# Altium PCB christmas_tree_pcb_copy.PcbDoc
Units mm, origin at the board's own origin, x right, y up, seen from the top; angles counter-clockwise.
Board outline 48 x 48 mm, 2 copper layers (Top Layer, Bottom Layer); 34 components, 19 nets, 76 pads, 29 vias.
Unrouted connection lines stored in the file: 3.
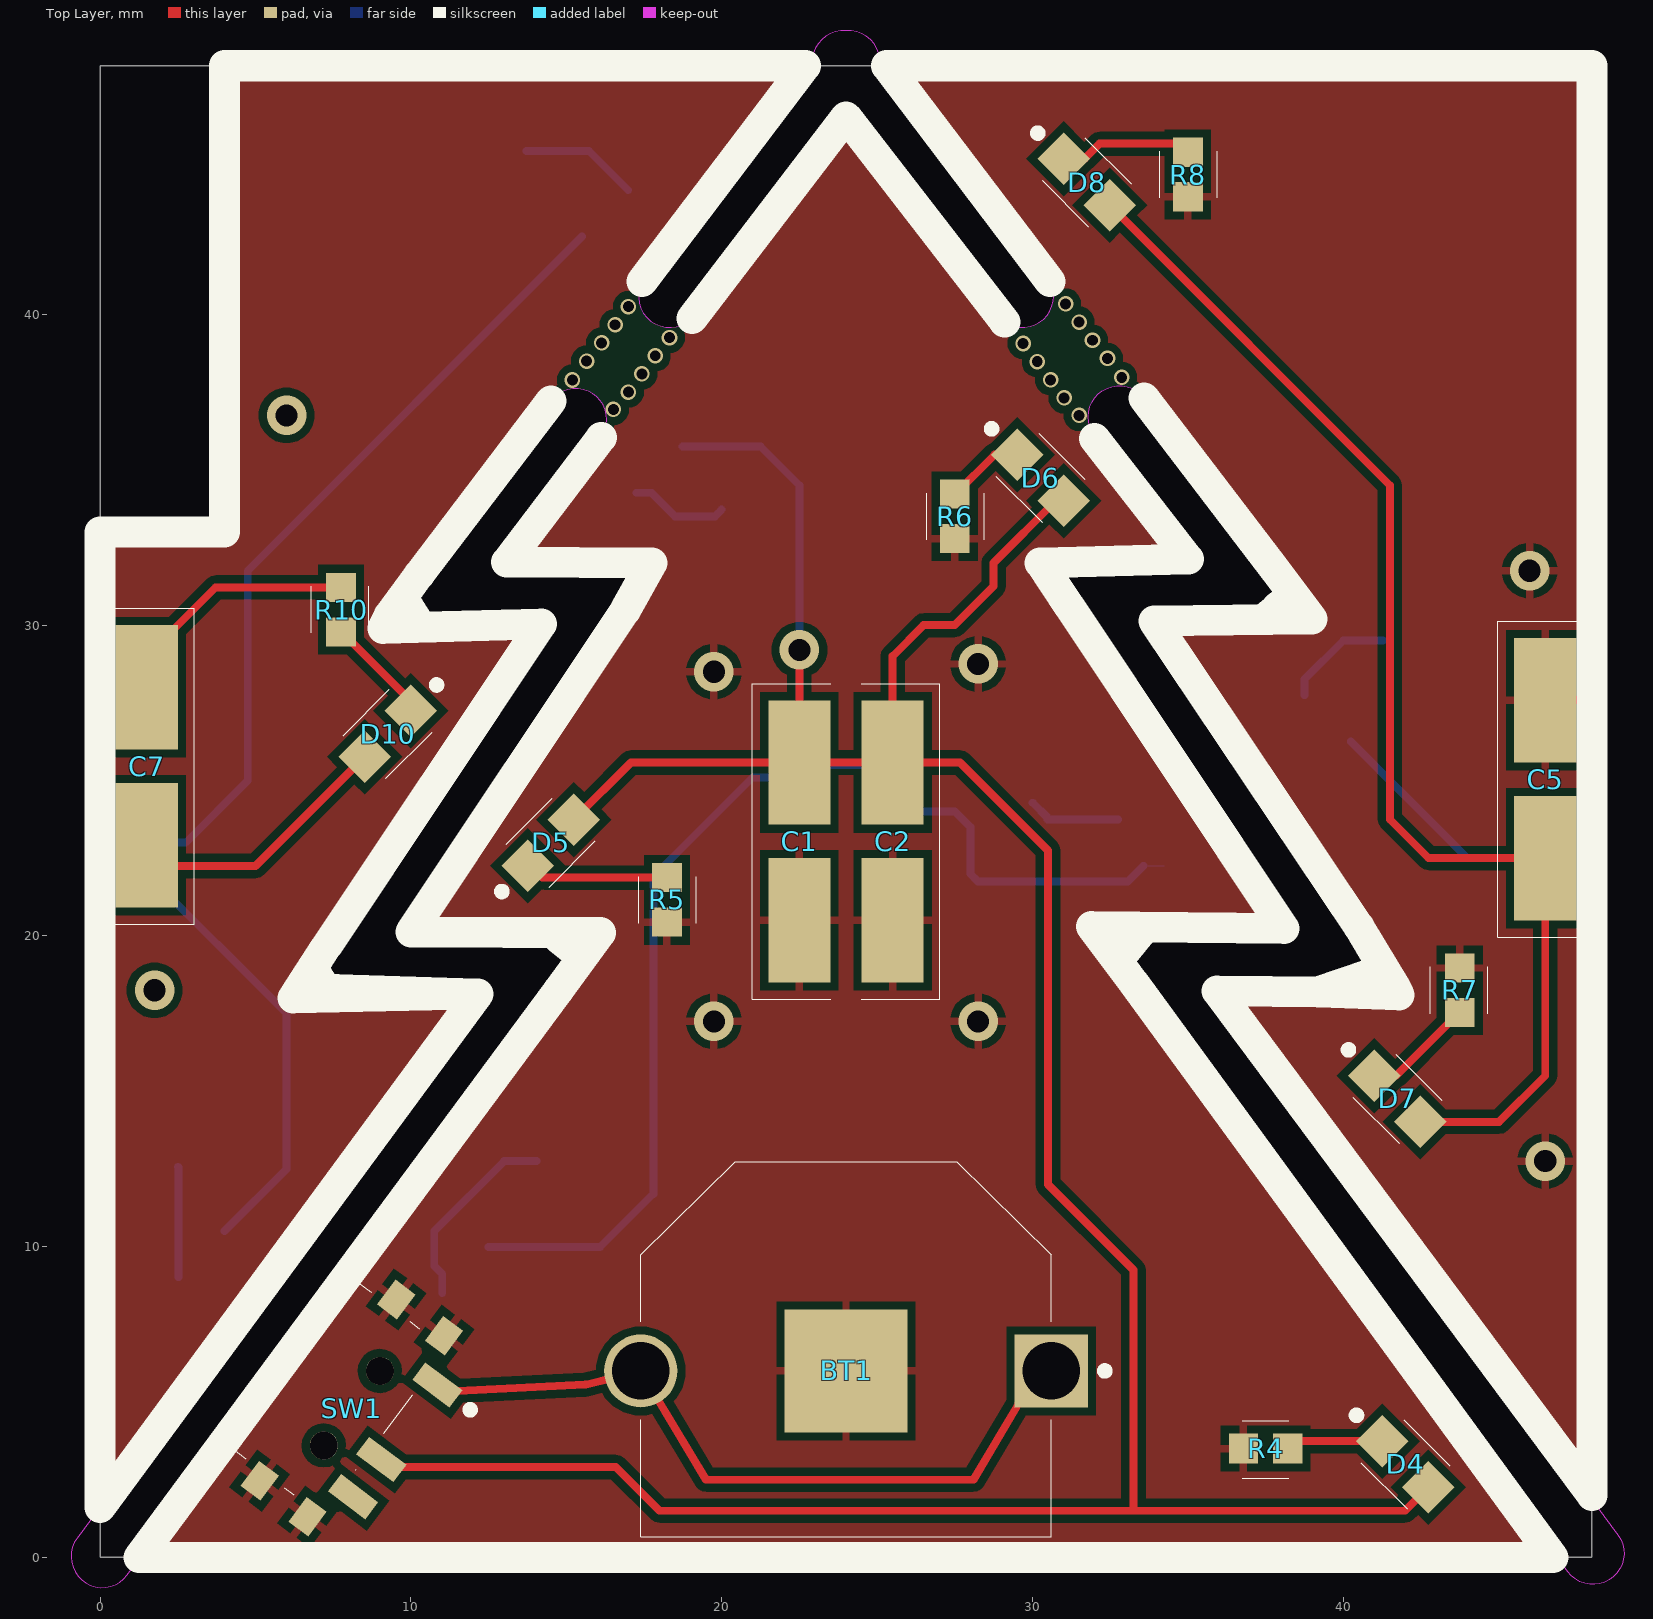
[diagram p0: Top Layer view]
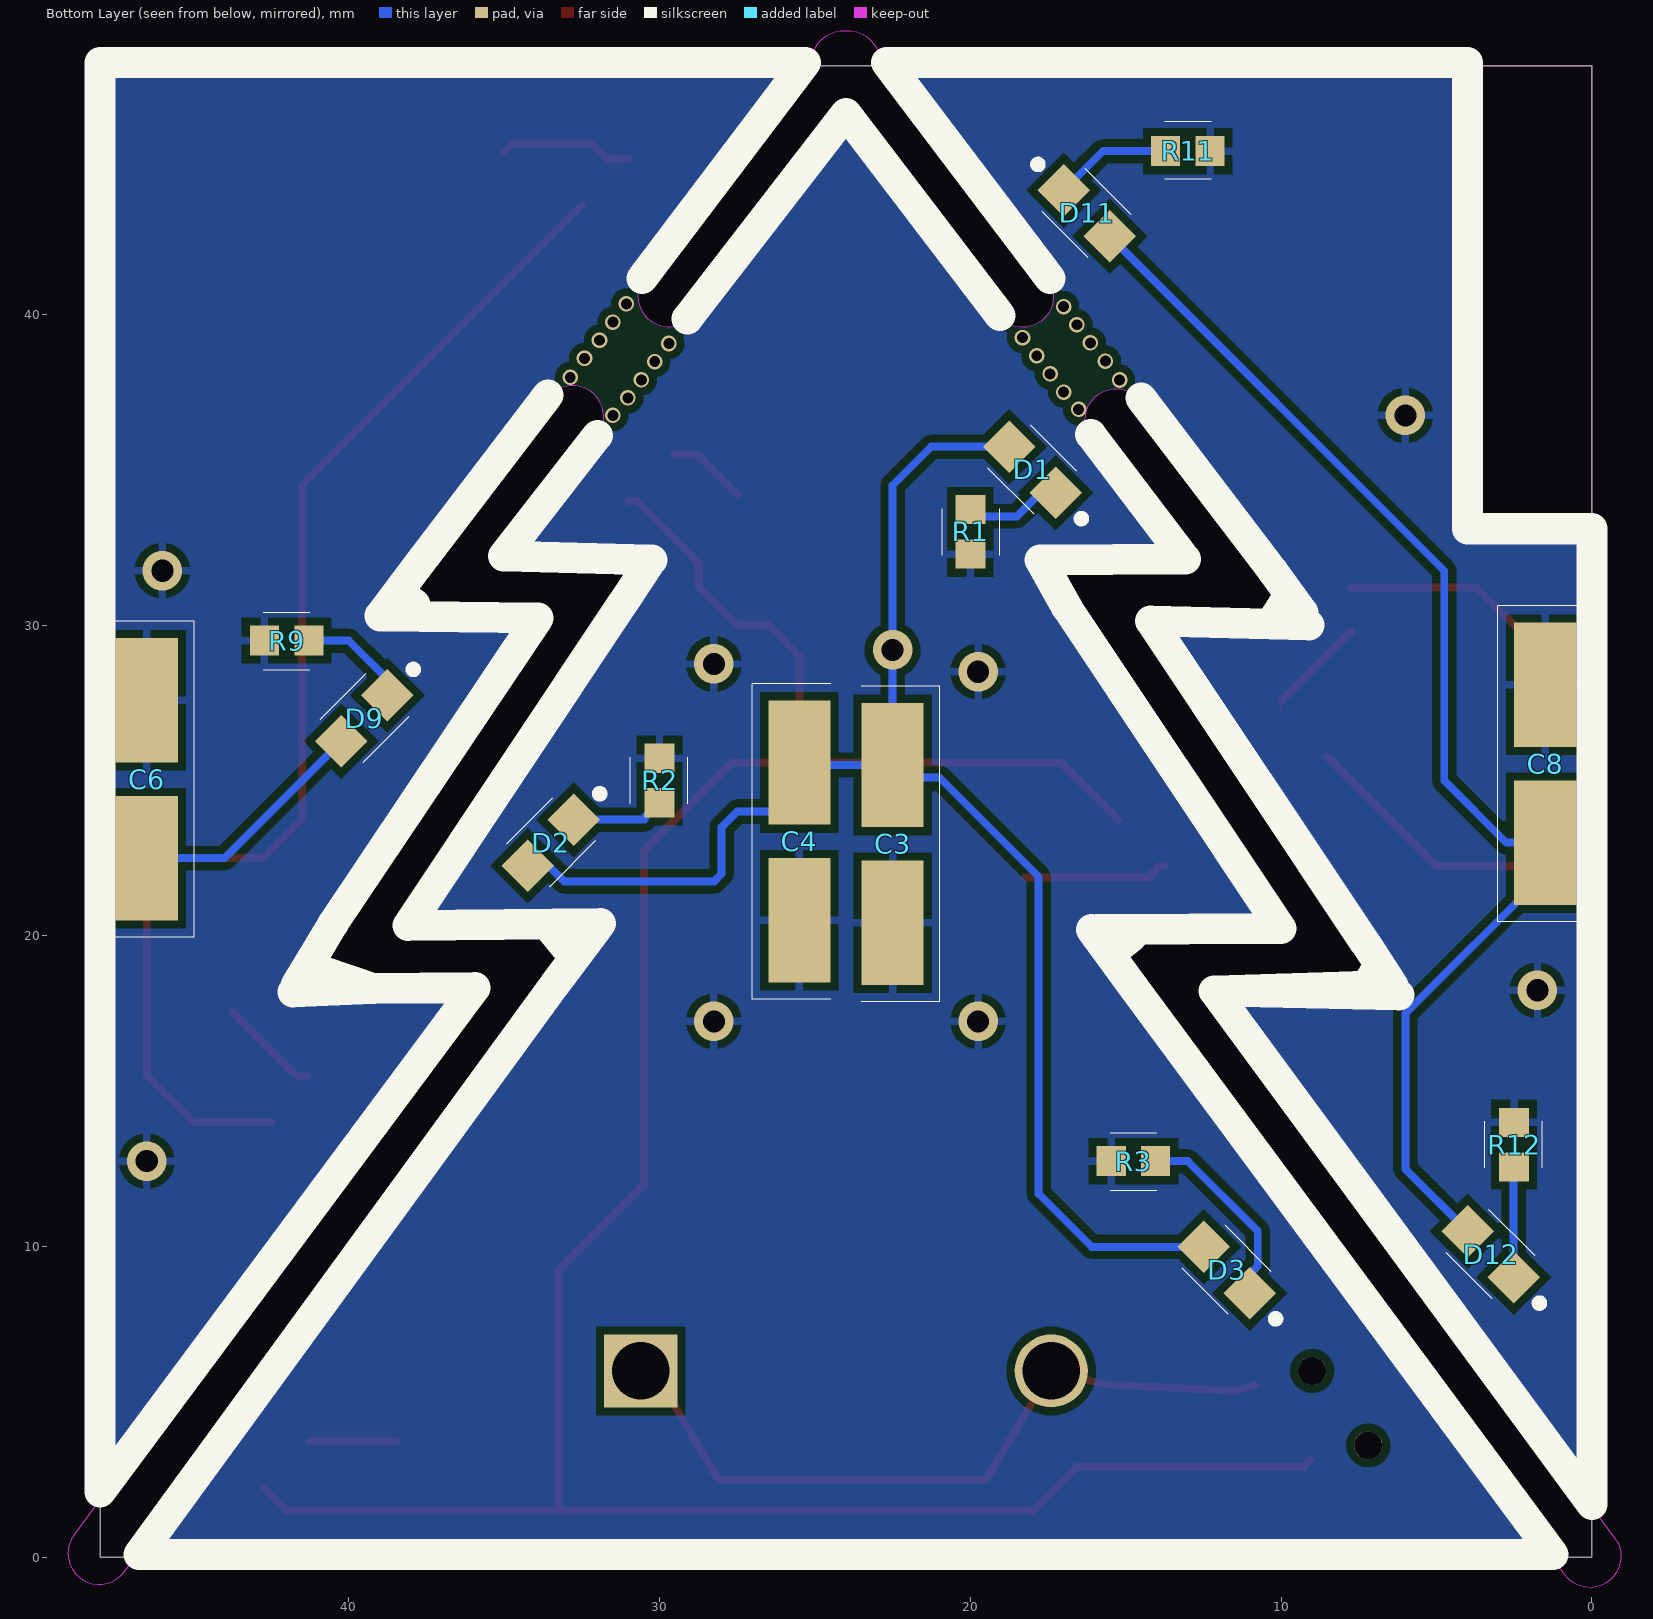
[diagram p1: Bottom Layer view, seen from below]
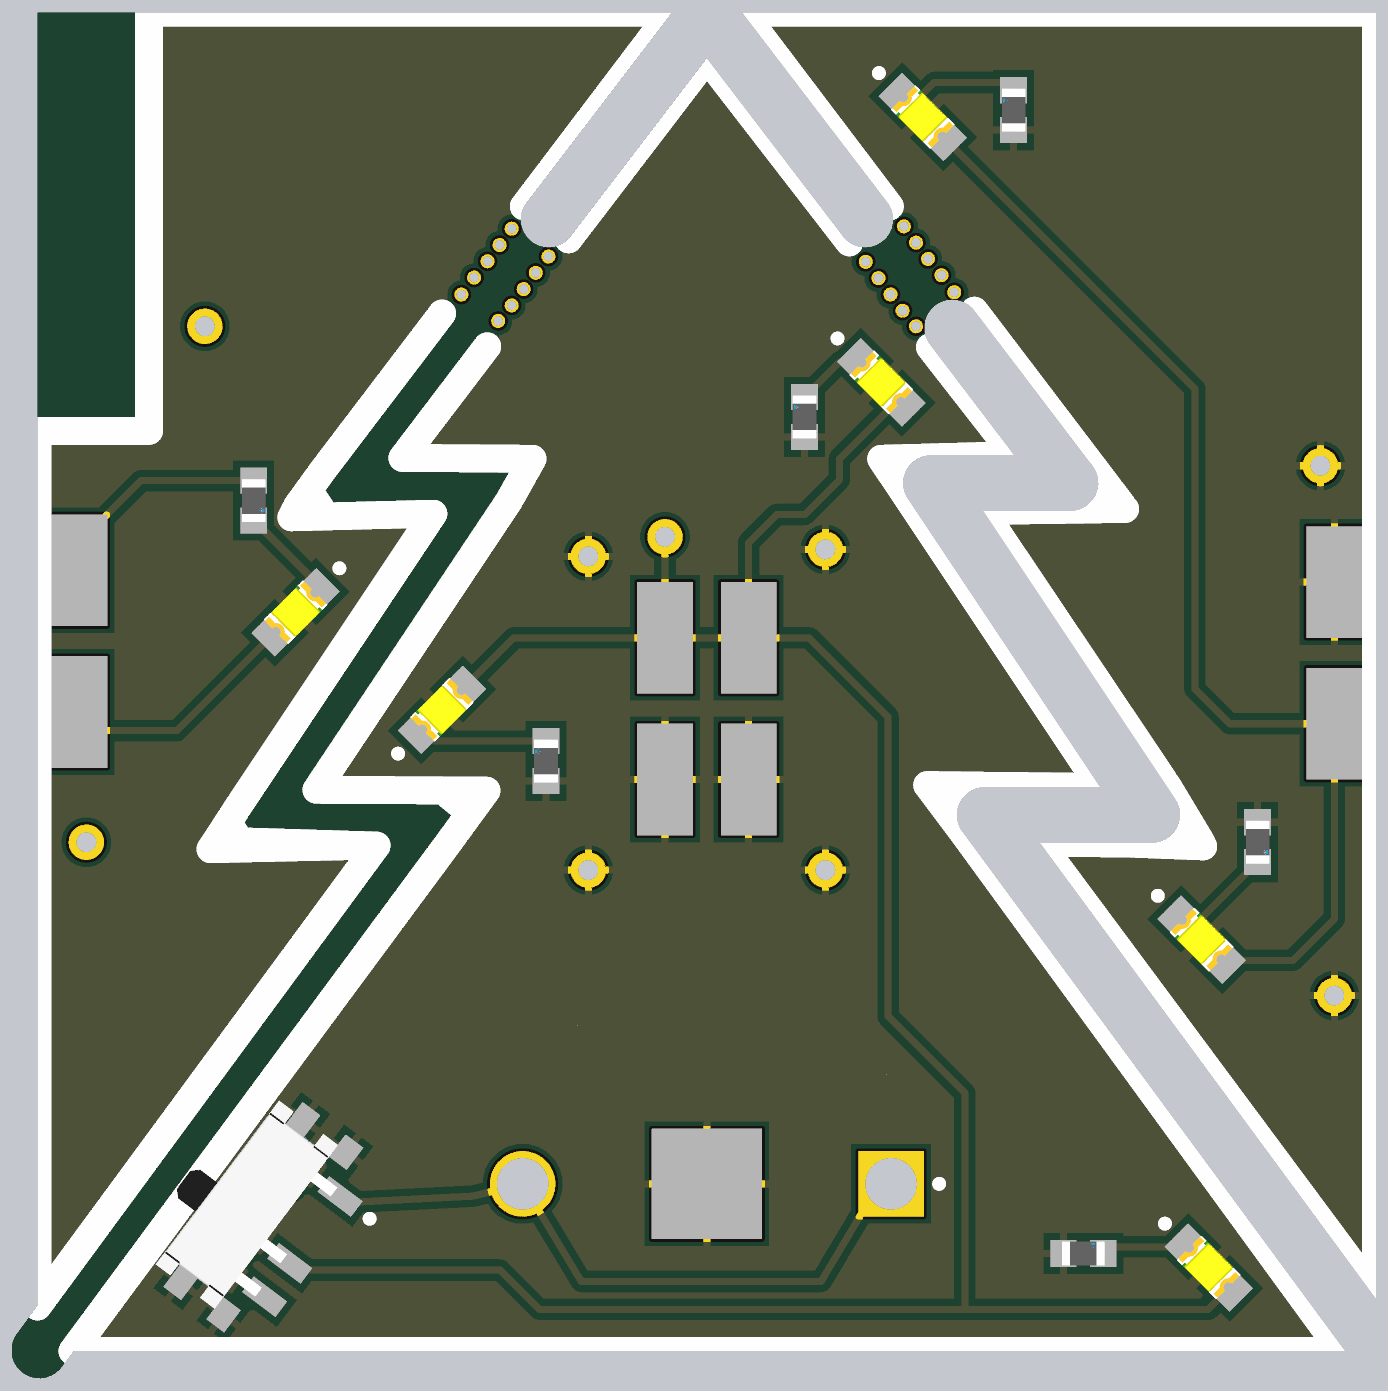
[diagram p2: 3D render of the assembled board from above, using the file's embedded part models]
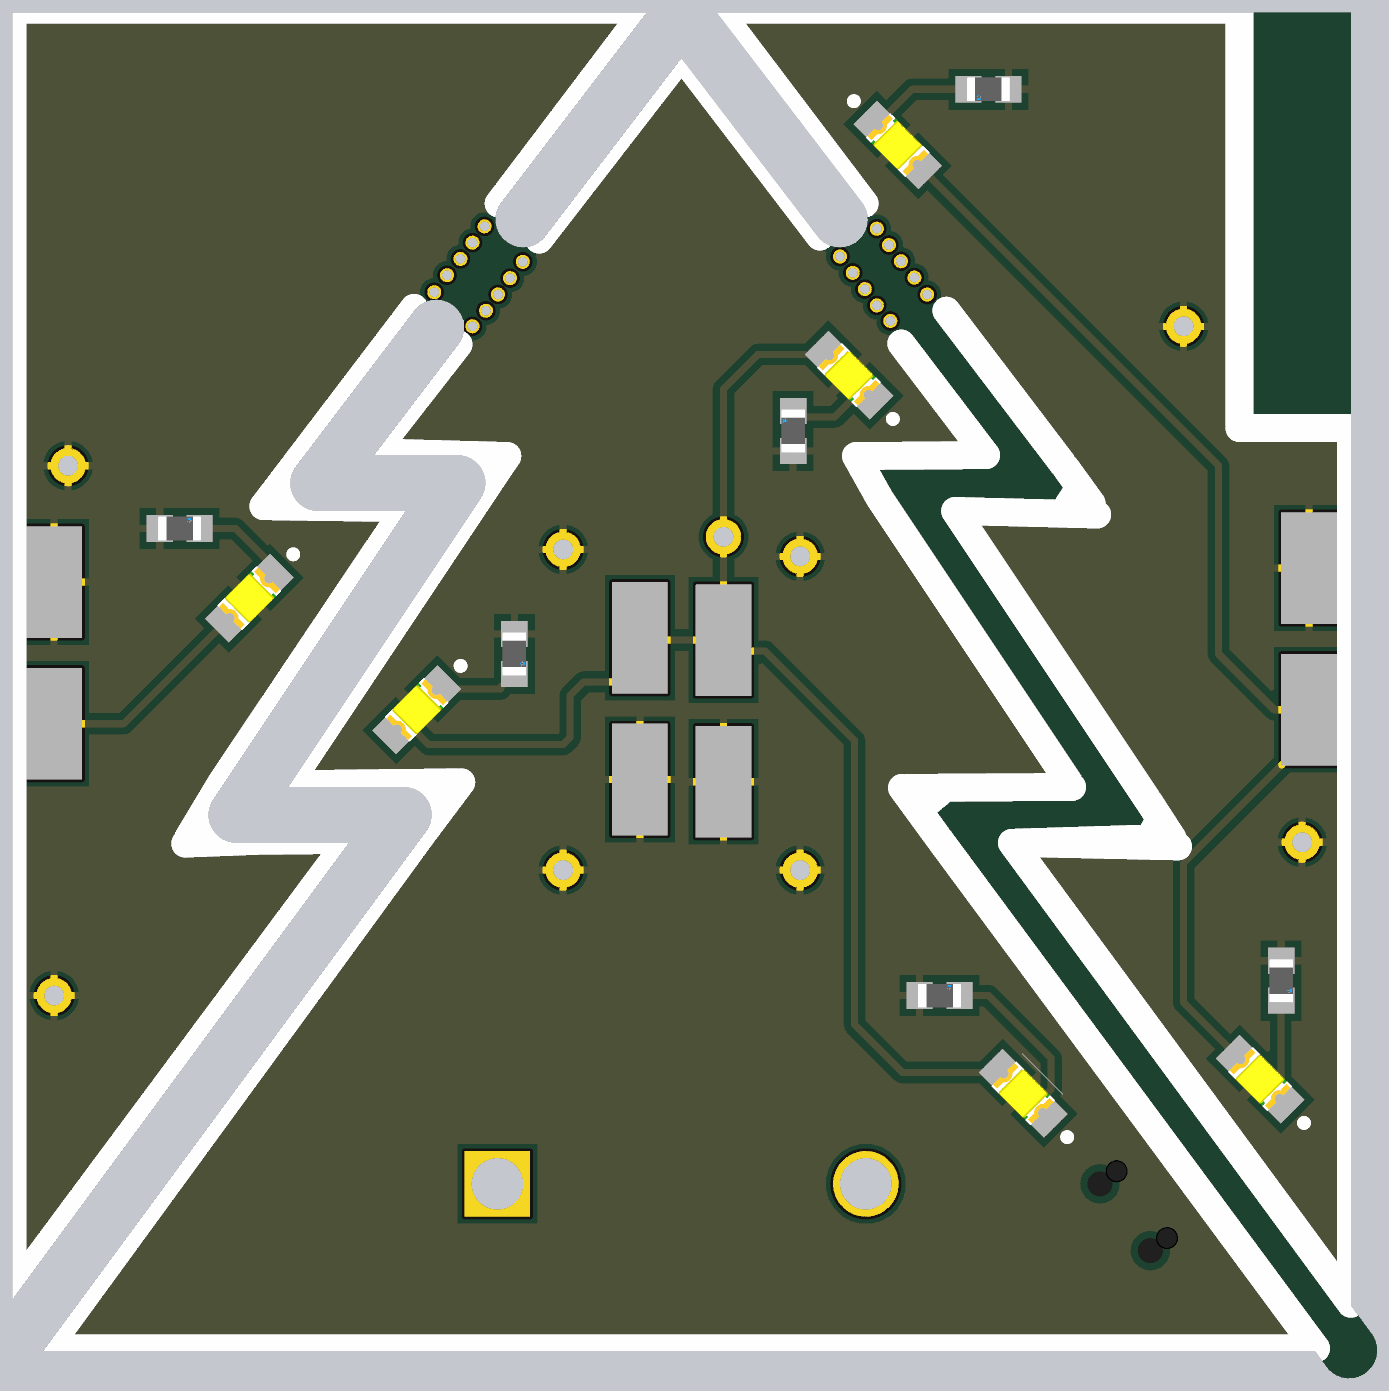
[diagram p3: 3D render of the assembled board from below, using the file's embedded part models]

## Layer stack, top to bottom
Top Solder: solder mask 0.0102, Solder Resist, Dk 3.5
Top Layer: signal copper 0.0356
Dielectric 1: dielectric 0.32, FR-4, Dk 4.8
Bottom Layer: signal copper 0.0356
Bottom Solder: solder mask 0.0102, Solder Resist, Dk 3.5

## Board outline
0,0 0,48 48,48 48,0
cut-out: -0.742,0.623 ccw(c0.064,0.03) 0.869,-0.564 14.943,18.536 ccw(c14.138,19.13) 15.138,19.13 ccw(c14.138,19.13) 14.138,20.131 10,20.131 16.896,30.475 ccw(c16.064,31.03) 17.064,31.03 ccw(c16.064,31.03) 16.064,32.03 13.081,32.03 16.1,36 ccw(c15.304,36.606) 16.304,36.606 ccw(c15.304,36.606) 14.507,37.211 10.267,31.635 ccw(c11.064,31.03) 11.064,30.029 14.194,30.029 7.299,19.685 ccw(c8.131,19.13) 8.131,18.13 12.158,18.13
cut-out: 17.531,41.188 ccw(c18.326,40.58) 19.121,39.973 24.003,46.357 28.885,39.973 ccw(c29.68,40.58) 30.68,40.58 ccw(c29.68,40.58) 30.475,41.188 25.089,48.231 ccw(c24.094,48.123) 24.003,49.119 ccw(c23.912,48.123) 22.917,48.231
cut-out: 48.842,0.723 cw(c48.036,0.13) 47.231,-0.464 33.157,18.636 cw(c33.962,19.23) 32.962,19.23 cw(c33.962,19.23) 33.962,20.231 38.1,20.231 31.204,30.575 cw(c32.036,31.13) 31.036,31.13 cw(c32.036,31.13) 32.036,32.13 35.019,32.13 32,36.1 cw(c32.796,36.706) 31.796,36.706 cw(c32.796,36.706) 33.593,37.311 37.833,31.735 cw(c37.036,31.13) 37.036,30.129 33.906,30.129 40.801,19.785 cw(c39.969,19.23) 39.969,18.23 35.942,18.23
cut-out: 0,33 4,33 4,48 0,48

## Design rules (kind name [scope] priority, off if disabled: settings)
Clearance [All] p1: gap=0.254 ignorepadtopadclearanceinfootprint=FALSE except(0: Arc-Hole Track-Hole SMDPad-Hole THPad-Hole Via-Hole Fill-Hole Poly-Hole Region-Hole Text-Hole)
PolygonConnect [All] p1: connectstyle=Relief reliefconductorwidth=0.254 reliefentries=4 polygonreliefangle="90 Angle" airgapwidth=0.254
RoutingVias [All] p1: holewidth=0.711 width=1.27 viastyle="Through Hole" minholewidth=0.711 minwidth=1.27 maxholewidth=0.711 maxwidth=1.27
SolderMaskExpansion [All] p1: expansion=0.102 istentingtop=FALSE
Width [All] p1: maxlimit=0.254 minlimit=0.254 preferedwidth=0.254
30 further rules are at their usual default settings.

## Components (designator, comment, footprint, x,y, rotation, side; value= is the part's Value field where it differs from the comment)
BT1 "3001" KSTN-3001_V 24,6 r180 top
C1 "conn_pcb" pcb_connector 22.5,25.58 r270 top
C2 "conn_pcb" pcb_connector 25.5,25.58 r270 top
C3 "conn_pcb" pcb_connector 22.5,25.5 r270 bottom
C4 "conn_pcb" pcb_connector 25.5,25.58 r270 bottom
C5 "conn_pcb" pcb_connector 46.5,22.5 r90 top
C6 "conn_pcb" pcb_connector 46.5,22.5 r90 bottom
C7 "conn_pcb" pcb_connector 1.5,22.92 r90 top
C8 "conn_pcb" pcb_connector 1.5,23 r90 bottom
D1 "APHCM2012SYCK-F01" FP-APHCM2012SYCK-F01-MFG 18,35 r45 bottom
D2 "APHCM2012SYCK-F01" FP-APHCM2012SYCK-F01-MFG 33.5,23 r315 bottom
D3 "APHCM2012SYCK-F01" FP-APHCM2012SYCK-F01-MFG 11.75,9.25 r45 bottom
D4 "APHCM2012SYCK-F01" FP-APHCM2012SYCK-F01-MFG 42,3 r315 top
D5 "APHCM2012SYCK-F01" FP-APHCM2012SYCK-F01-MFG 14.5,23 r45 top
D6 "APHCM2012SYCK-F01" FP-APHCM2012SYCK-F01-MFG 30.258,34.742 r315 top
D7 "APHCM2012SYCK-F01" FP-APHCM2012SYCK-F01-MFG 41.742,14.758 r315 top
D8 "APHCM2012SYCK-F01" FP-APHCM2012SYCK-F01-MFG 31.742,44.258 r315 top
D9 "APHCM2012SYCK-F01" FP-APHCM2012SYCK-F01-MFG 39.5,27 r315 bottom
D10 "APHCM2012SYCK-F01" FP-APHCM2012SYCK-F01-MFG 9.25,26.5 r225 top
D11 "APHCM2012SYCK-F01" FP-APHCM2012SYCK-F01-MFG 16.25,43.25 r225 bottom
D12 "APHCM2012SYCK-F01" FP-APHCM2012SYCK-F01-MFG 3.258,9.758 r45 bottom
R1 "CRCW0603100RJNEA" FP-CRCW0603-e3-IPC_B 20,33 r90 bottom
R2 "CRCW0603100RJNEA" FP-CRCW0603-e3-IPC_B 30,25 r270 bottom
R3 "CRCW0603100RJNEA" FP-CRCW0603-e3-IPC_B 14.75,12.75 r180 bottom
R4 "CRCW0603100RJNEA" FP-CRCW0603-e3-IPC_B 37.5,3.5 r0 top
R5 "CRCW0603100RJNEA" FP-CRCW0603-e3-IPC_B 18.235,21.158 r90 top
R6 "CRCW0603100RJNEA" FP-CRCW0603-e3-IPC_B 27.5,33.5 r90 top
R7 "CRCW0603100RJNEA" FP-CRCW0603-e3-IPC_B 43.75,18.25 r270 top
R8 "CRCW0603100RJNEA" FP-CRCW0603-e3-IPC_B 35,44.5 r90 top
R9 "CRCW0603100RJNEA" FP-CRCW0603-e3-IPC_B 42,29.5 r180 bottom
R10 "CRCW0603100RJNEA" FP-CRCW0603-e3-IPC_B 7.75,30.5 r270 top
R11 "CRCW0603100RJNEA" FP-CRCW0603-e3-IPC_B 13,45.25 r0 bottom
R12 "CRCW0603100RJNEA" FP-CRCW0603-e3-IPC_B 2.5,13.285 r270 bottom
SW1 "PCM12SMTR" FP-PCM12SMTR-MFG 7.498,5.253 r233 top

## Footprints (in the part's own frame and the unit in brackets; to place one, negate y for a bottom-side part, rotate by r counter-clockwise, add the part's x,y. Pads: shape width x height; smd on the part's side, far side on the other; paste and mask are expansions set on the pad)
FP-APHCM2012SYCK-F01-MFG [mm]
  rect 1.2x1.2 smd paste+0 mask+0: 1(-1.05,0) 2(1.05,0)
  silkscreen extent -2.35,-0.98 1.05,0.98, body extent -1,-0.62 1,0.63, height 0.5
FP-CRCW0603-e3-IPC_B [mm]
  rect 0.935x0.962 smd paste+0 mask+0: 1(-0.715,0) 2(0.715,0)
  silkscreen extent -0.75,-0.95 0.75,0.9, body extent -0.77,-0.43 0.77,0.43, height 0.5
FP-PCM12SMTR-MFG [mm]
  rect 0.7x1.5 smd paste+0 mask+0: 1(-2.25,2.5) 2(0.75,2.5) 3(2.25,2.5)
  rect 1x0.8 smd paste+0 mask+0: 4(-3.65,1.715) 5(3.65,1.715) 6(-3.65,-0.215) 7(3.65,-0.215)
  round 0.9 hole 0.9 unplated paste-1000 mask+0: ""(-1.5,0.75) ""(1.5,0.75)
  silkscreen extent -3.35,-2.05 3.35,3.95, body extent -4.25,-2.15 4.25,3.35, height 0.25
KSTN-3001_V [mm] "THD, 2-Leads, Body 13.21x12.07mm"
  rect 2.35x2.35 hole 1.85: 1(-6.605,0)
  round 2.35 hole 1.85: 2(6.605,0)
  rect 3.96x3.96 smd: 3(0,0)
  silkscreen extent -8.45,-6.73 6.61,5.34, body extent -6.61,-6.73 6.61,5.34, height 3
pcb_connector [mm]
  rect 4x2 smd: 0(0,0) 1(5.08,0)
  silkscreen extent -2.54,-1.52 7.62,1.02

## Part data
BT1: library part CMP-2000-05463-1, "Holder Battery Coin, 12 mm, 2-Pin THD, RoHS", Manufacturer=Keystone, Package Description="2-Pin Through Hole Device, Body 13.21 x 12.07 mm", Datasheet URL=https://datasheet.ciiva.com/3/3001-3954.pdf, Datasheet Version="Rev. H, 09/2006", Manufacturer URL=http://www.keyelco.com/, Mounting Technology=ThroughHole, Package Reference=3001
D1 D2 D3 D4 D5 D6 D7 D8 D9 D10 D11 D12: library part CMP-44529-000064-1, "LED YELLOW CLEAR CHIP SMD", Case Code (Imperial)=0805, Case Code (Metric)=2012, Color=Yellow, Forward Current=20mA, Forward Voltage=2V, Illumination Color=Green, Lens Color=Clear, Max Operating Temperature=85°C, Min Operating Temperature=-40°C, Package Quantity=2000, Case/Package=0805, Dominant Wavelength=590nm, Height=0.4mm, Lead Free="Lead Free", Length=2mm, Lens Style=Clear, Luminous Intensity=150mcd, Mount="Surface Mount", Number of LEDs=1, Number of Pins=2, Packaging="Tape and Reel", RoHS Compliant=Yes, Series=APHCM, Test Current=20mA, Viewing Angle=110°, Wavelength=590nm, Width=1.25mm
R1 R2 R3 R4 R5 R6 R7 R8 R9 R10 R11 R12: library part CMP-2000-03827-2, "RES Thick Film, 100Ω, 5%, 0.1W, 200ppm/°C, 0603", Case Code (Imperial)=0603, Case Code (Metric)=1608, Max Operating Temperature=155°C, Max Power Dissipation=100mW, Min Operating Temperature=-55°C, Package Quantity=1, Resistance=100R, Temperature Coefficient=200ppm/°C, Tolerance=5%, Voltage Rating=75V, Case/Package=0603, Composition="Thick Film", Contact Plating=Tin, Depth=0.85mm, Features="Automotive AEC-Q200", Height=0.02inch, Length=1.55mm, Military Standard=Not, Number of Terminations=2, Packaging="Tape and Reel", Power Rating=100mW, Radiation Hardening=No, Termination=SMD/SMT, Weight=7.1E-05oz, Width=0.85mm
SW1: library part CMP-2000-06884-2, "SWITCH SLIDE SPDT 300MA 6V", Contact Current Rating=300mA, Contact Resistance=70mR, Insulation Resistance=100mR, Max Operating Temperature=85°C, Max Voltage Rating (DC)=6V, Min Operating Temperature=-20°C, Package Quantity=1, Actuator Length=1.5mm, Actuator Material=Nylon, Actuator Type=Standard, Contact Material="Copper Alloy", Contact Plating=Silver, Current Rating=300mA, Depth=5mm, Lead Free="Lead Free", Length=7.7mm, Max Current Rating=300mA, Mechanical Life=10000Cycles, Mount="Surface Mount", Orientation="Right Angle", Packaging="Tape and Reel", REACH SVHC="No SVHC", Switch Function=On-On, Switch Travel=1.5mm, Termination="Gull Wing", Throw Configuration=SPDT, Voltage Rating (AC)=6V, Voltage Rating (DC)=6V, Width=6.7mm

## Via types
v1: diameter 0.5, hole 0.35, Top Layer to Bottom Layer, 20 vias
v2: diameter 1.27, hole 0.711, Top Layer to Bottom Layer, 9 vias

## Nets (pads, with @x,y where several pads share a name; then routed paths per layer and width w, separated by ;. In a path a pad name is that pad's centre, name@x,y a point inside that pad or via, vN(x,y) a via of type N, cw(c..) or ccw(c..) an arc to the next point about the centre after c; other vN are vias at no path point)
GND: BT1.3 C1.1 C2.1 C3.1 C4.1 R1.1 R2.1 R3.1 R4.1 R5.1 R6.1 SW1.4 SW1.5 SW1.6 SW1.7
  other v2: 19.75,17.25 28.25,17.25 19.75,28.5 28.25,28.75
NetBT1_1: BT1.1 BT1.2 SW1.1 | length 23.7
  Top Layer w0.254: SW1.1 11.481,5.349 15.622,5.561 BT1.2 19.5,2.5 28.098,2.5 29.557,4.952 BT1.1
NetC5_0: C5.0 C6.0 D7.2 D8.2 D9.2 | length 48.5
  Top Layer w0.254: D8.2 41.5,34.5 41.5,23.75 42.75,22.5 C5.0 46.5,15.5 45.015,14.015 D7.2
  Bottom Layer w0.254: D9.2 44,22.5 C6.0
NetC5_1: C5.1 C6.1 R7.1 R8.1 R9.1
  other v2: 46.5,12.75 46,31.75
NetC7_0: C7.0 C8.0 D10.2 D11.2 D12.2 | length 50
  Top Layer w0.254: C7.0 2.17,22.25 5,22.25 D10.2
  Bottom Layer w0.254: D12.2 6,12.5 6,17.5 1.5,22 C8.0 2.75,23 4.75,25 4.75,31.75 D11.2
NetC7_1: C7.1 C8.1 R10.1 R11.1 R12.1 | length 8.2
  Top Layer w0.254: C7.1 1.5,29 3.715,31.215 R10.1
  other v2: 1.75,18.25 6,36.75
NetD1_1: D1.1 R1.2 | length 3.1
  Bottom Layer w0.254: D1.1 17.742,34.258 18.5,33.5 19.785,33.5 R1.2
NetD2_1: D2.1 R2.2 | length 3
  Bottom Layer w0: 30.486,23.742 30.486,23.777
  Bottom Layer w0.254: R2.2 30.014,24.285 30.486,23.812 30.486,23.777 ; 30.486,23.742 D2.1
NetD3_1: D3.1 R3.2 | length 6.3
  Bottom Layer w0.254: D3.1 11.008,9.12 10.75,9.378 10.75,10.5 13,12.75 R3.2
NetD4_1: D4.1 R4.2 | length 3.1
  Top Layer w0: R4.2 R4.2@38.458,3.742
  Top Layer w0.254: R4.2@38.458,3.742 D4.1
NetD5_1: D5.1 R5.2 | length 4.9
  Top Layer w0: D5.1@14.084,21.916 D5.1@14.172,21.828
  Top Layer w0.254: D5.1 13.904,22.258 14.288,21.873 R5.2 ; D5.1@14.137,21.968 D5.1@14.225,21.88
NetD6_1: D6.1 R6.2 | length 2.5
  Top Layer w0.254: R6.2 27.514,34.215 28.783,35.485 D6.1
NetD7_1: D7.1 R7.2 | length 3.3
  Top Layer w0.254: D7.1@41.334,15.5 41.702,15.5 43.736,17.535 R7.2
NetD8_1: D8.1 R8.2 | length 4.3
  Top Layer w0.254: D8.1 31.669,45 32.161,45.492 34.724,45.492 R8.2
NetD9_1: D9.1 R9.2 | length 3.6
  Bottom Layer w0.254: D9.1 38.758,28.258 40,29.5 R9.2
NetD10_1: D10.1 R10.2 | length 3.5
  Top Layer w0: D10.1 D10.1@9.992,27.556
  Top Layer w0.254: R10.2 7.764,29.785 D10.1@9.992,27.556
NetD11_1: D11.1 R11.2 | length 3.8
  Bottom Layer w0.254: R11.2 15.735,45.25 D11.1
NetD12_1: D12.1 R12.2 | length 3.6
  Bottom Layer w0.254: R12.2 2.515,12.554 D12.1
V+: C1.0 C2.0 C3.0 C4.0 D1.2 D2.2 D3.2 D4.2 D5.2 D6.2 SW1.2 | length 139.9
  Top Layer w0.254: SW1.2 9.284,2.909 16.591,2.909 18,1.5 33.25,1.5 ; D5.2 17.08,25.58 C1.0 ; v2(22.5,29.2) C1.0 ; D6.2 30.75,34 28.75,32 28.75,31.25 27.5,30 26.5,30 25.5,29 C2.0 ; D4.2 41.985,1.5 33.25,1.5 ; C1.0 C2.0 ; C2.0 27.67,25.58 30.5,22.75 30.5,12 33.25,9.25 33.25,1.5
  Bottom Layer w0: D2.2@33.574,22.258 D2.2
  Bottom Layer w0.254: D3.2 16.092,9.992 17.8,11.7 17.8,21.9 21,25.1 22.1,25.1 C3.0 ; D1.2 21.258,35.742 22.5,34.5 22.5,30.3 v2(22.5,29.2) C3.0 ; D2.2@33.574,22.258 33.066,21.75 28.25,21.75 28,22 28,23.5 27.5,24 26.373,24 25.5,24.873 C4.0 25.42,25.5 C3.0
pads on no net: SW1. SW1.3
copper on no net:
  other v1: 31.5,36.75 16.517,36.941 31.017,37.309 17,37.5 15.197,37.888 30.586,37.893 32.872,37.972 17.432,38.084 30.154,38.477 15.654,38.497 32.414,38.582 17.864,38.668 29.697,39.061 16.136,39.082 31.932,39.166 18.321,39.253 16.568,39.666 31.5,39.75 17,40.25 31.068,40.334

## Polygon pours and split planes (outlines as drawn)
no net on Top Layer "NONET_L01_P010" (solid, pour order 10): 4,48 22.75,48 10.454,31.356 10.547,30.494 14.5,30.25 7.447,19.349 7.583,18.621 12.716,18.388 0,0 0,33 4,33
NetC5_1 on Top Layer "NETC5_1_L01_P006" (solid, pour order 6): 25.25,48 37.968,31.583 36.75,31 32.75,31 40.802,19.875 39.75,19.25 34.988,18.991 38.25,14.75 48,0 48,48 26.75,48
GND on Top Layer "GND_L01_P000" (solid, pour order 0): 24.003,46.357 35.75,31.9 32.5,31.9 31.7,31.25 39.5,19.5 34.5,19.5 34.25,19.25 47,0 1.25,0 14.25,19.25 14.5,19.5 9.5,20 16.5,31.5 12.5,31.9 22.5,44.5
GND on Bottom Layer "GND_L02_P013" (solid, pour order 13): 24.003,46.357 35.75,31.9 32.5,31.9 31.7,31.25 39.5,19.5 34.5,19.5 34.25,19.25 47,0 1.25,0 14.25,19.25 14.5,19.5 9.5,20 16.5,31.5 12.5,31.9 22.5,44.5
NetC5_1 on Bottom Layer "NETC5_1_L02_P012" (solid, pour order 12): 25.25,48 37.968,31.583 36.75,31 32.75,31 40.802,19.875 39.75,19.25 34.988,18.991 38.25,14.75 48,0 48,48 26.75,48
NetC7_1 on Bottom Layer "NETC7_1_L02_P011" (solid, pour order 11): 4,48 22.75,48 10.454,31.356 10.547,30.494 14.5,30.25 7.447,19.349 7.583,18.621 12.716,18.388 0,0 0,33 4,33

## Silkscreen, mask and mechanical layers (free items; w line width, h text height)
Top Overlay:
  lines w0: 0,33 4,33 4,48
  lines w1: 7,18.7 7.3,18.2 7.617,18.272 12.158,18.13 ; 7.223,19.572 6.4,18.3 6.2,18 12.158,18.13 ; 7.299,19.685 14.194,30.029 9.1,29.9 9.3,30.3 10.225,31.579 ; 9.9,30.6 10.3,30 ; 10.267,31.635 14.507,37.211 ; 14.776,19.907 15.4,19.4 ; 15.7,20.1 15.9,20.1 ; 16.125,36.032 13.081,32.03 17.75,32 16.896,30.475 10,20.131 15.9,20.1 ; 17.437,41.051 22.7,48 4,48 4,33 0,33 0,1.6 12.158,18.13 ; 19.041,39.868 24.003,46.357 29.109,39.758 ; 30.563,41.051 25.3,48 48,48 48,2 35.942,18.23 39.5,18.2 ; 31.163,30.636 30.25,32 35.019,32.13 32,36 ; 31.204,30.575 38.1,20.231 31.9,20.3 32.2,19.9 33.4,18.3 ; 33,19.522 33.488,20.117 ; 33.25,18.5 46.75,0 1.25,0 14.75,18.25 16.1,20.1 15.9,20.1 ; 33.593,37.311 37.833,31.735 39,30.2 33.906,30.129 40.5,20.3 41.7,18.3 41.8,18.1 39.2,18.2 40.851,18.758 ; 37.445,30.206 37.776,30.456 ; 37.87,30.56 38.416,30.968
Bottom Overlay:
  lines w0: 0,33 4,33 4,48 ; 1.182,0.165 46.75,0 ; 25.5,48 48,48 48.025,1.901
  lines w1: 6.2,18.1 12.158,18.23 ; 6.4,18.4 7.223,19.672 ; 7,18.8 7.3,18.3 ; 7.299,19.785 14.194,30.129 9.1,30 ; 7.617,18.372 12.158,18.23 ; 9.3,30.4 10.225,31.679 ; 9.9,30.7 10.3,30.1 ; 10.267,31.735 14.507,37.311 ; 14.776,20.007 15.4,19.5 ; 15.9,20.2 10,20.231 16.896,30.575 17.75,32.1 13.081,32.13 16.125,36.132 ; 16.1,20.2 14.75,18.35 1.25,0.1 46.75,0.1 33.25,18.6 ; 17.437,41.151 22.7,48.1 4,48.1 4,33.1 0,33.1 0,1.7 12.158,18.23 ; 19.041,39.968 24.003,46.457 29.109,39.858 ; 30.563,41.151 25.3,48.1 48,48.1 48,2.1 35.942,18.33 39.5,18.3 ; 31.163,30.736 30.25,32.1 35.019,32.23 32,36.1 ; 31.204,30.675 38.1,20.331 31.9,20.4 32.2,20 33.4,18.4 ; 33,19.622 33.488,20.217 ; 33.593,37.411 37.833,31.835 39,30.3 33.906,30.229 40.5,20.4 41.7,18.4 ; 37.87,30.66 38.416,31.068 ; 40.851,18.858 39.2,18.3 41.8,18.2
Mechanical 1:
  drawing of 174 lines, arcs and shapes, not listed